# Altium PCB 3D-RelayBoard-multi.PcbDoc
Units mm, origin at the board's own origin, x right, y up, seen from the top; angles counter-clockwise.
Board outline 156 x 231 mm, 4 copper layers (Top Layer, Mid-Layer 1, Mid-Layer 2, Bottom Layer); 62 components, 75 nets, 234 pads, 9 vias.
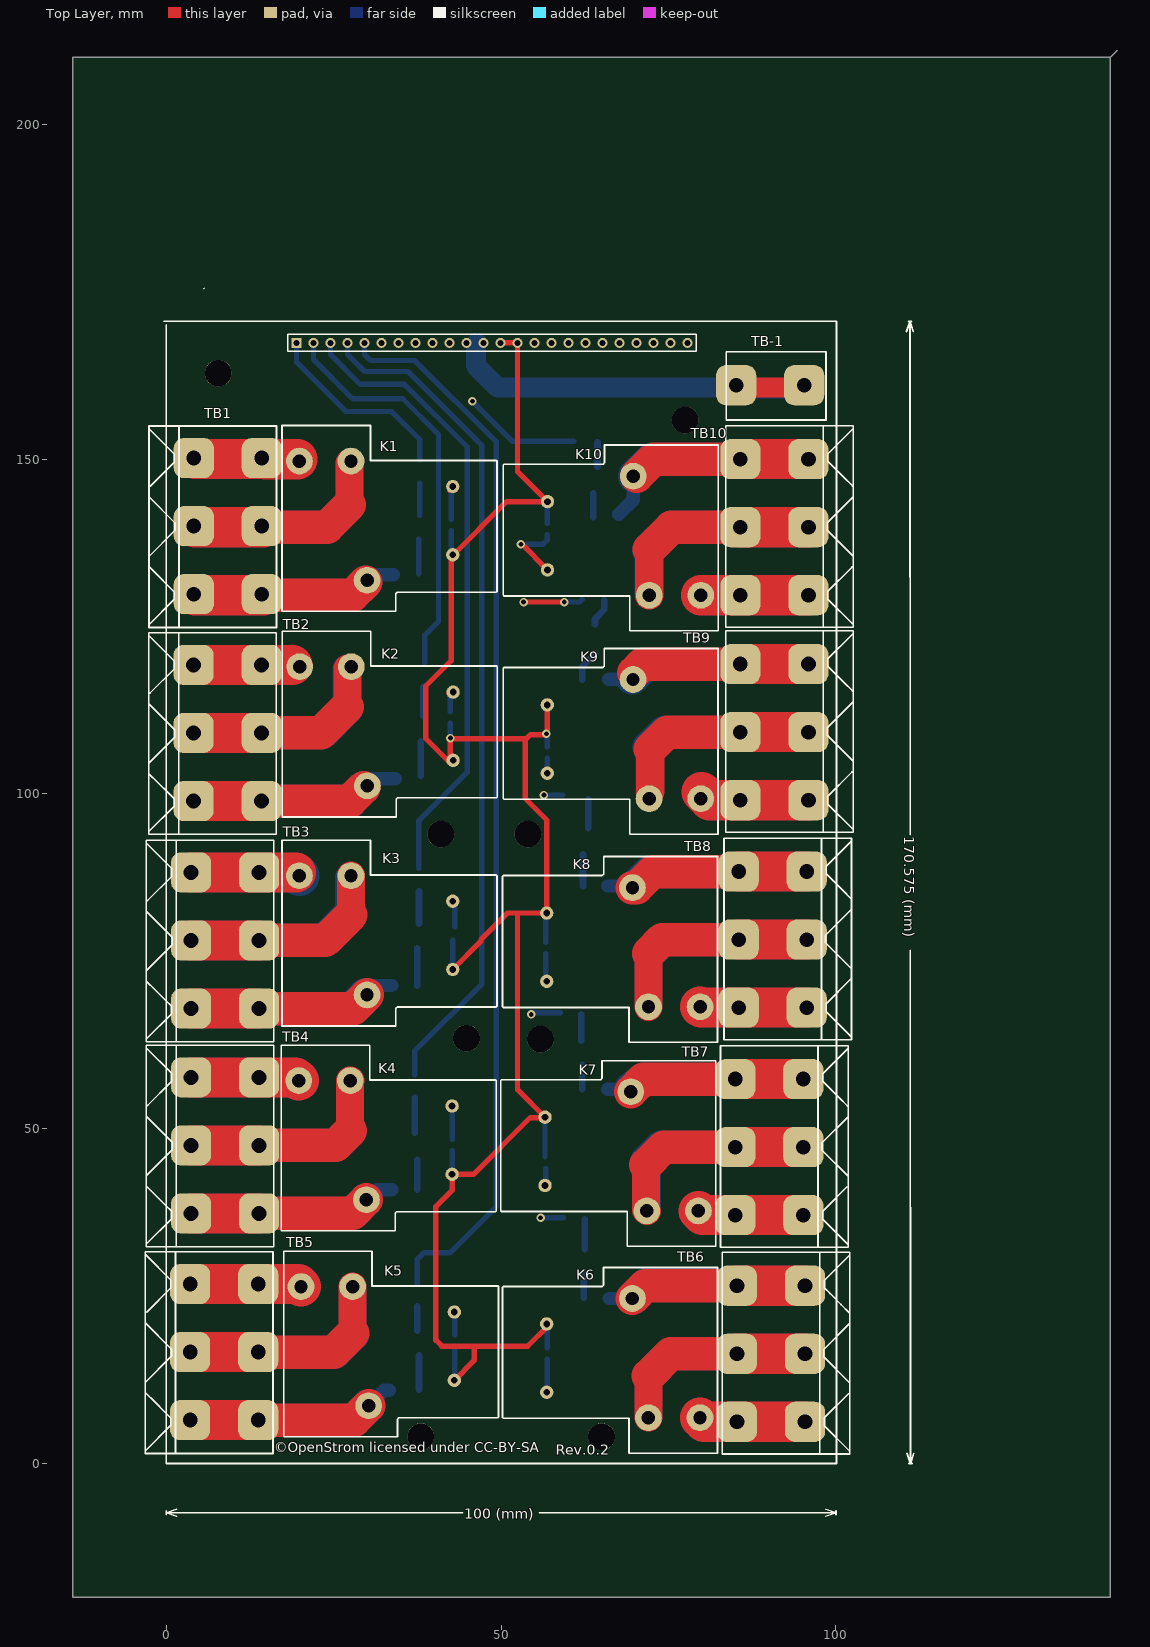
[diagram p0: Top Layer view]
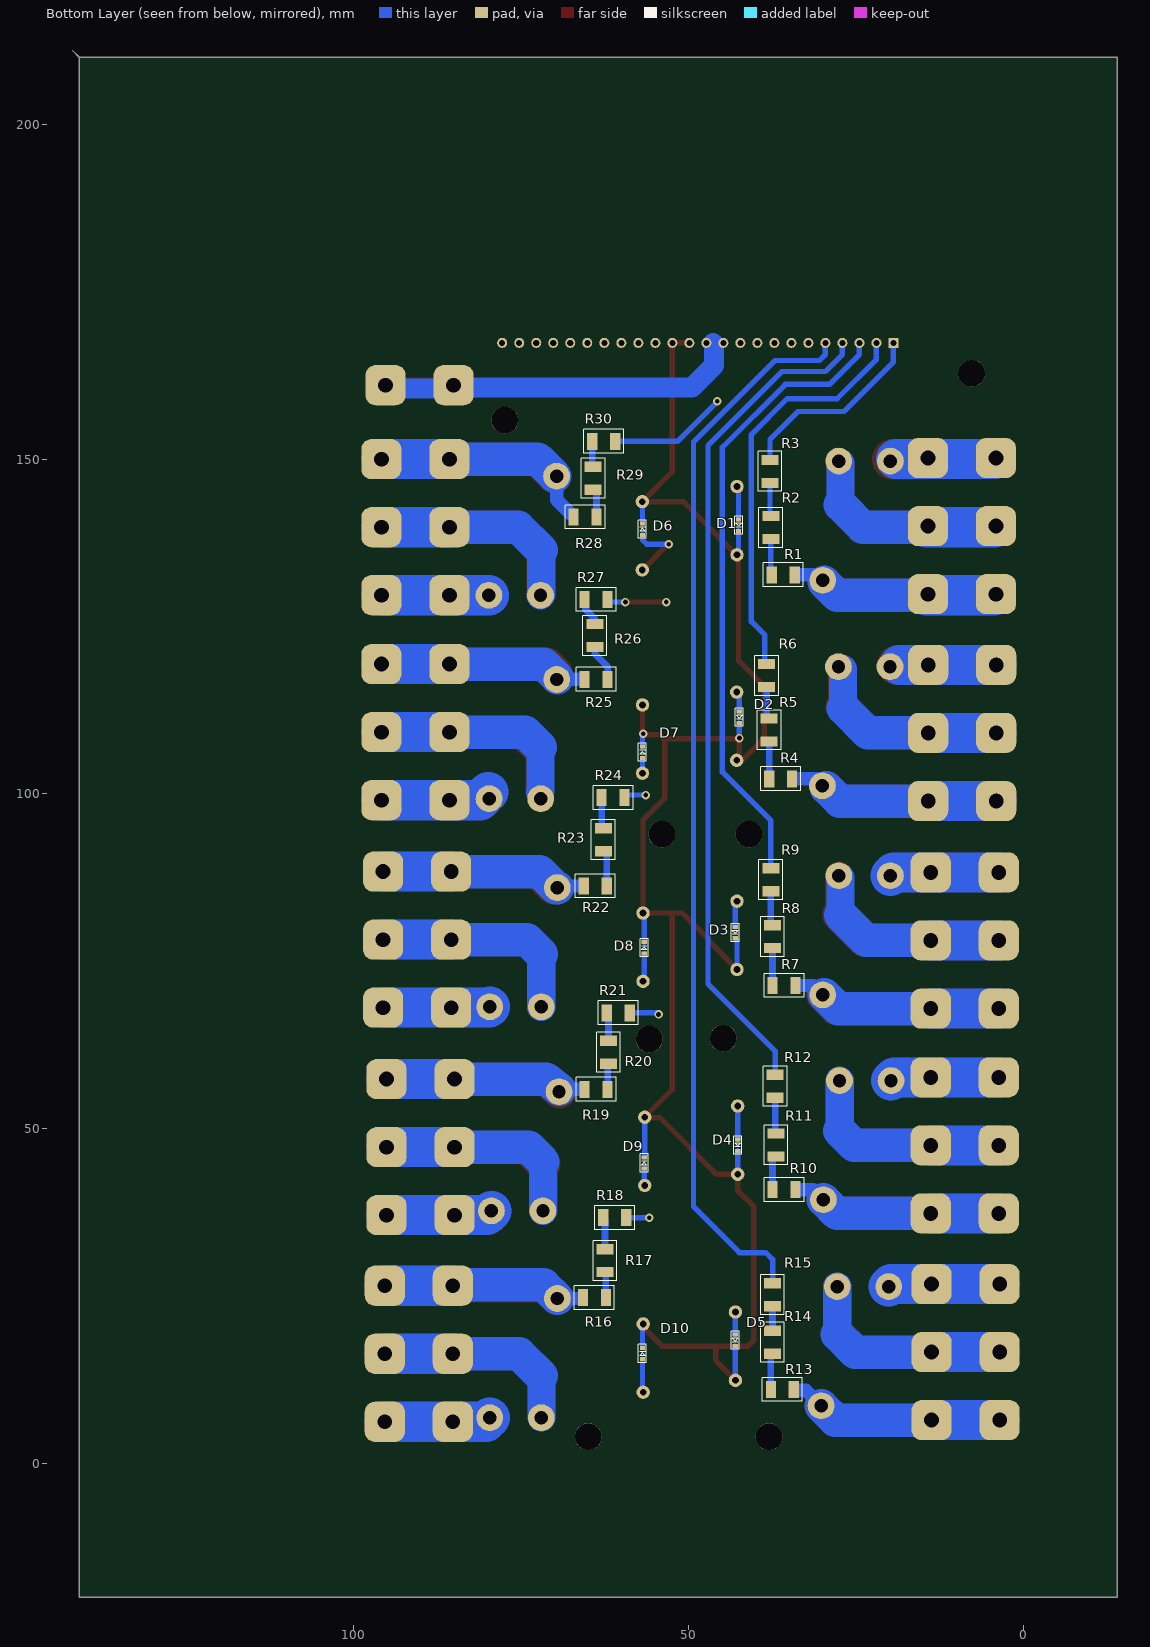
[diagram p1: Bottom Layer view, seen from below]
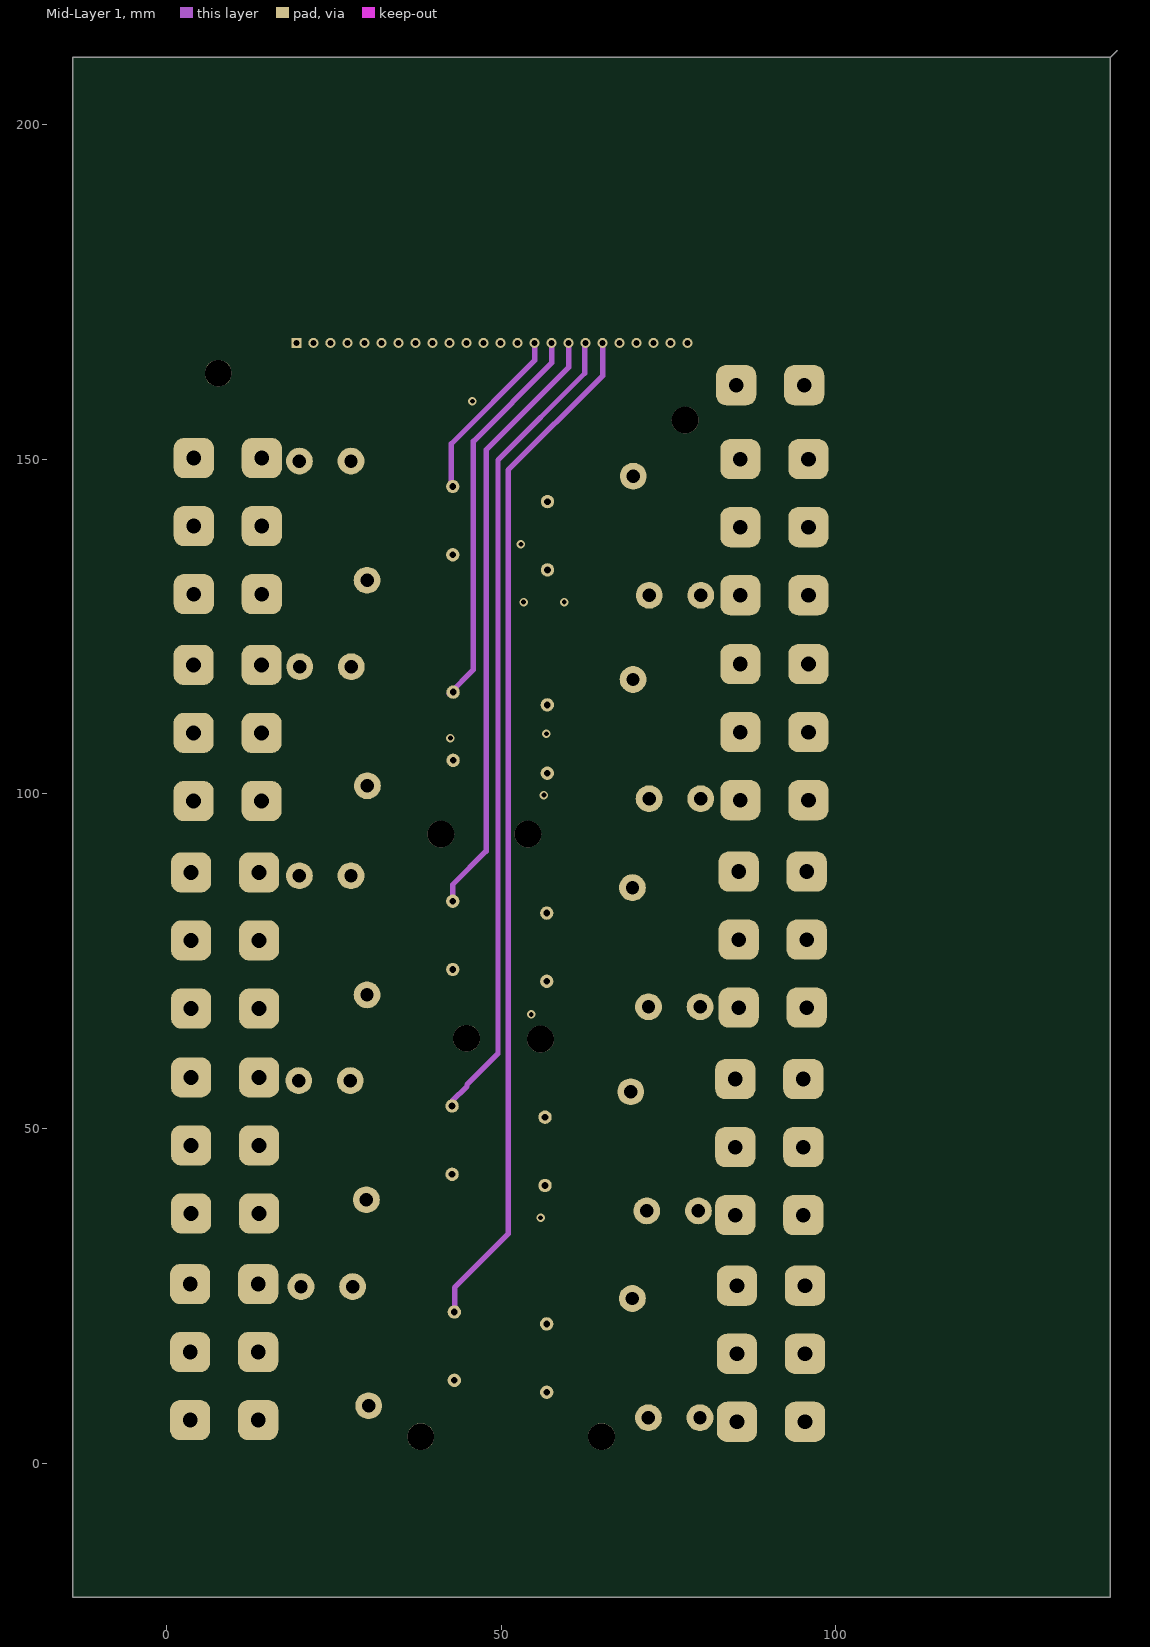
[diagram p2: Mid-Layer 1]
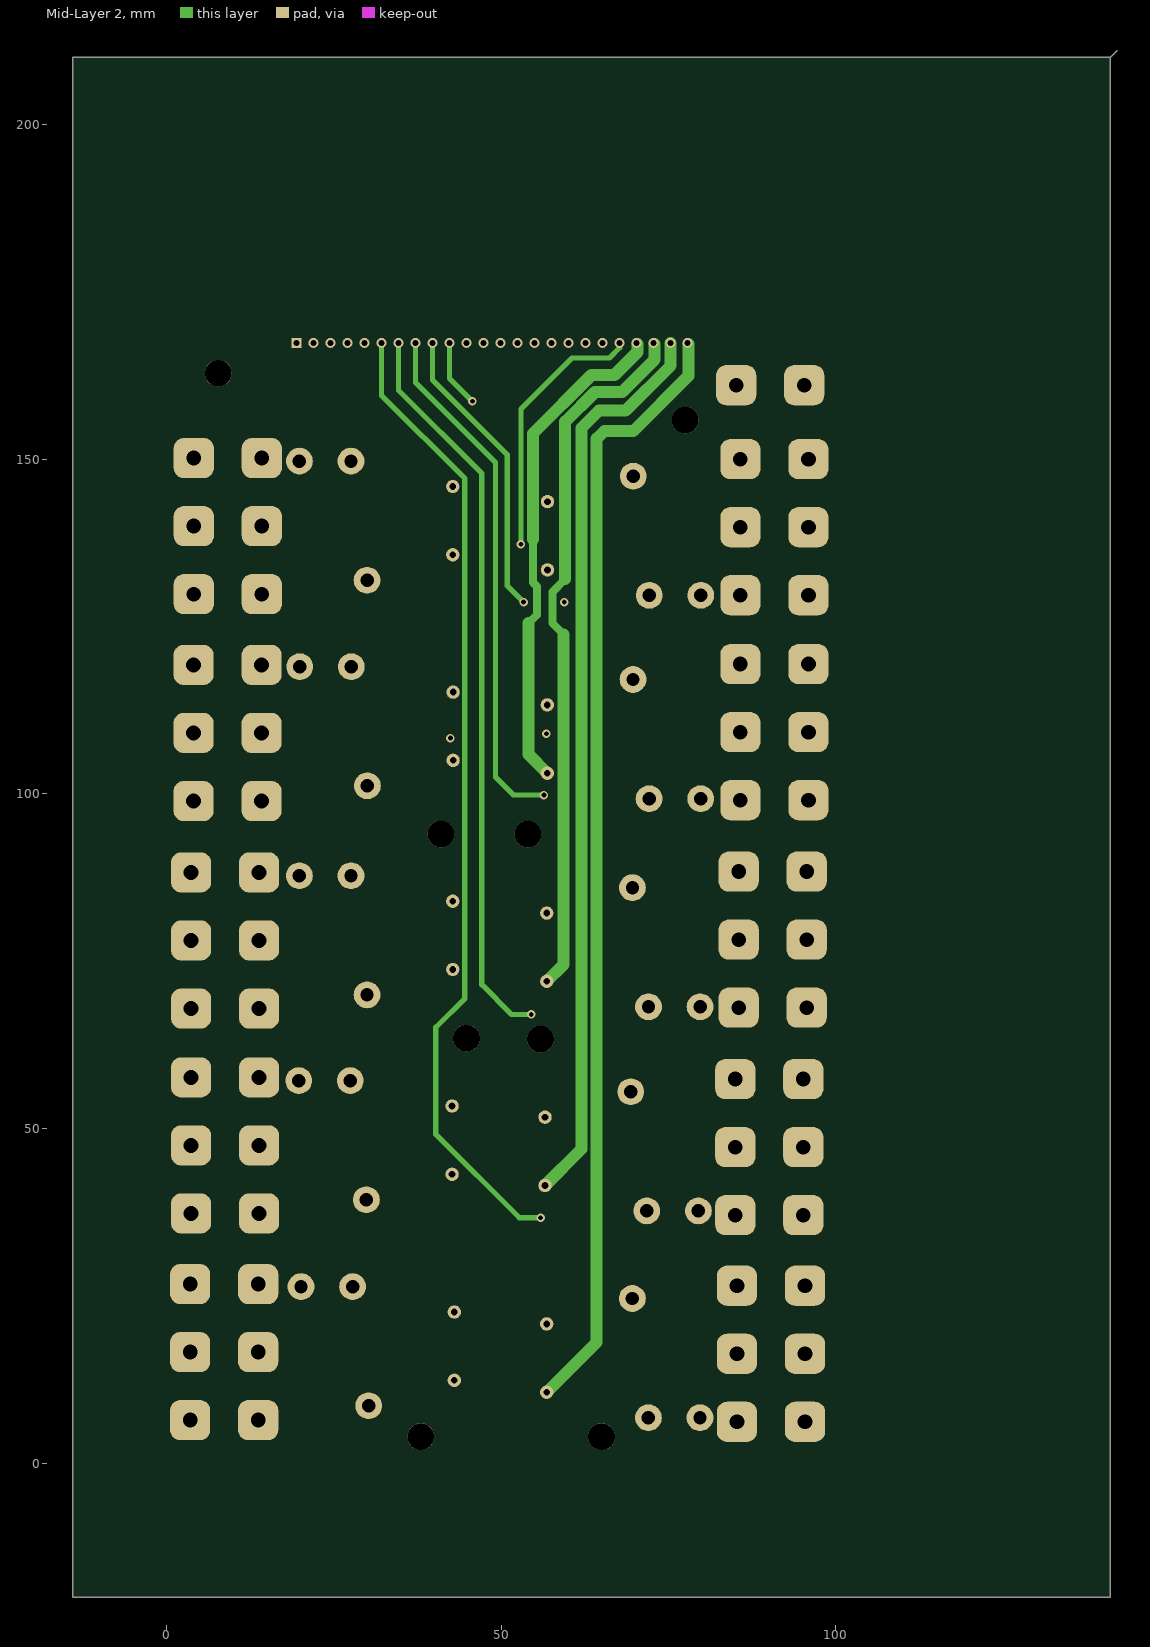
[diagram p3: Mid-Layer 2]

## Layer stack, top to bottom
Top Layer: signal copper 0.0356
Dielectric: core 0.32, FR-4, Dk 4.8
Mid-Layer 1: signal copper 0.0356
Dielectric: prepreg 0.32, FR-4, Dk 4.8
Mid-Layer 2: signal copper 0.0356
Dielectric: core 0.32, FR-4, Dk 4.8
Bottom Layer: signal copper 0.0356

## Board outline
-14,-20 -14,210 141,210 142,211 141,210 141,-20

## Design rules (kind name [scope] priority, off if disabled: settings)
Clearance [All] p1: gap=0.254
Height [All] p1: minheight=0 maxheight=35 prefheight=12.7
HoleSize [All] p1: absolutevalues=TRUE maxlimit=10 minlimit=0.025 maxpercent=80.000 minpercent=20.000
PolygonConnect [All] p1: connectstyle=Relief reliefconductorwidth=0.254 reliefentries=4 polygonreliefangle="90 Angle" airgapwidth=0.254
RoutingVias [All] p1: holewidth=0.711 width=1.27 viastyle="Through Hole" minholewidth=0.711 minwidth=1.27 maxholewidth=10 maxwidth=1.27
SilkToSilkClearance [All] p1 off: silktosilkclearance=0.254
SilkToSolderMaskClearance [IsPad] p1 off: minsilkscreentomaskgap=0.254 clearancetoexposedcopper=TRUE
SolderMaskExpansion [All] p1: expansion=0.102
Width [All] p1: maxlimit=10 minlimit=0.254 preferedwidth=0.254
24 further rules are at their usual default settings.

## Components (designator, comment, footprint, x,y, rotation, side; value= is the part's Value field where it differs from the comment)
D1 "1N4148" SOD523 42.545,139.27 r90 bottom
D2 "1N4148" SOD523 42.418,110.568 r90 bottom
D3 "1N4148" SOD523 43.053,78.437 r90 bottom
D4 "1N4148" SOD523 42.672,46.687 r90 bottom
D5 "1N4148" SOD523 43.053,17.526 r90 bottom
D6 "1N4148" SOD523 56.896,140.384 r270 bottom
D7 "1N4148" SOD523 56.896,107.061 r270 bottom
D8 "1N4148" SOD523 56.642,77.851 r270 bottom
D9 "1N4148" SOD523 56.642,45.72 r270 bottom
D10 "1N4148" SOD523 56.896,17.272 r270 bottom
K1 "Relay-SPDT" "Relay BT90 - duplicate" 29.975,131.9 r90 top
K2 "Relay-SPDT" "Relay BT90 - duplicate" 30.025,101.2 r90 top
K3 "Relay-SPDT" "Relay BT90 - duplicate" 29.972,69.977 r90 top
K4 "Relay-SPDT" "Relay BT90 - duplicate" 29.872,39.38 r90 top
K5 "Relay-SPDT" "Relay BT90 - duplicate" 30.213,8.616 r90 top
K6 "Relay-SPDT" "Relay BT90 - duplicate" 69.596,24.638 r270 top (schematic designator K10)
K7 "Relay-SPDT" "Relay BT90 - duplicate" 69.355,55.519 r270 top (schematic designator K9)
K8 "Relay-SPDT" "Relay BT90 - duplicate" 69.609,85.999 r270 top
K9 "Relay-SPDT" "Relay BT90 - duplicate" 69.696,117.084 r270 top (schematic designator K7)
K10 "Relay-SPDT" "Relay BT90 - duplicate" 69.723,147.447 r270 top (schematic designator K6)
P1 "Header 24" HDR24x1Male 99.787,215.594 r0 top
R1 "270K/5%/.5" 1210C-GENERIC 37.592,132.715 r180 bottom
R2 "270K/5%/.5" 1210C-GENERIC 37.719,141.478 r270 bottom
R3 "270K/5%/.5" 1210C-GENERIC 37.846,149.86 r270 bottom
R4 "270K/5%/.5" 1210C-GENERIC 37.973,102.235 r180 bottom
R5 "270K/5%/.5" 1210C-GENERIC 37.973,111.252 r270 bottom
R6 "270K/5%/.5" 1210C-GENERIC 38.354,119.38 r270 bottom
R7 "270K/5%/.5" 1210C-GENERIC 37.465,71.374 r180 bottom
R8 "270K/5%/.5" 1210C-GENERIC 37.465,80.391 r270 bottom
R9 "270K/5%/.5" 1210C-GENERIC 37.719,88.9 r270 bottom
R10 "270K/5%/.5" 1210C-GENERIC 37.465,40.894 r180 bottom
R11 "270K/5%/.5" 1210C-GENERIC 36.957,49.276 r270 bottom
R12 "270K/5%/.5" 1210C-GENERIC 37.084,58.039 r270 bottom
R13 "270K/5%/.5" 1210C-GENERIC 37.719,11.049 r180 bottom
R14 "270K/5%/.5" 1210C-GENERIC 37.465,19.812 r270 bottom
R15 "270K/5%/.5" 1210C-GENERIC 37.465,26.924 r270 bottom
R16 "270K/5%/.5" 1210C-GENERIC 62.357,24.765 r0 bottom (schematic designator R28)
R17 "270K/5%/.5" 1210C-GENERIC 62.484,32.004 r270 bottom (schematic designator R29)
R18 "270K/5%/.5" 1210C-GENERIC 59.309,36.703 r0 bottom (schematic designator R30)
R19 "270K/5%/.5" 1210C-GENERIC 62.103,55.88 r0 bottom (schematic designator R25)
R20 "270K/5%/.5" 1210C-GENERIC 61.976,63.119 r270 bottom (schematic designator R26)
R21 "270K/5%/.5" 1210C-GENERIC 58.801,67.31 r0 bottom (schematic designator R27)
R22 "270K/5%/.5" 1210C-GENERIC 62.23,86.233 r0 bottom
R23 "270K/5%/.5" 1210C-GENERIC 62.738,94.869 r270 bottom
R24 "270K/5%/.5" 1210C-GENERIC 59.563,99.441 r0 bottom
R25 "270K/5%/.5" 1210C-GENERIC 62.103,117.094 r0 bottom (schematic designator R19)
R26 "270K/5%/.5" 1210C-GENERIC 64.008,125.349 r270 bottom (schematic designator R20)
R27 "270K/5%/.5" 1210C-GENERIC 62.103,129.032 r0 bottom (schematic designator R21)
R28 "270K/5%/.5" 1210C-GENERIC 63.754,141.351 r0 bottom (schematic designator R16)
R29 "270K/5%/.5" 1210C-GENERIC 64.262,148.844 r270 bottom (schematic designator R17)
R30 "270K/5%/.5" 1210C-GENERIC 60.96,152.654 r0 bottom (schematic designator R18)
TB1 "DG135-3" DG135-1 4.1,150.15 r270 top
TB2 "DG135-3" DG135-1 4.064,119.253 r270 top
TB3 "DG135-3" DG135-1 3.683,88.265 r270 top
TB4 "DG135-3" DG135-1 3.683,57.658 r270 top
TB5 "DG135-3" DG135-1 3.556,26.797 r270 top
TB6 "DG135-3" DG135-1 95.377,6.223 r90 top (schematic designator TB10)
TB7 "DG135-3" DG135-1 95.123,37.084 r90 top (schematic designator TB9)
TB8 "DG135-3" DG135-1 95.631,68.072 r90 top
TB9 "DG135-3" DG135-1 95.885,99.06 r90 top (schematic designator TB7)
TB10 "DG135-3" DG135-1 95.885,129.667 r90 top (schematic designator TB6)
TB-1 "DG135-1" DG135-0 85.1,161.025 r0 top

## Footprints (in the part's own frame and the unit in brackets; to place one, negate y for a bottom-side part, rotate by r counter-clockwise, add the part's x,y. Pads: shape width x height; smd on the part's side, far side on the other; paste and mask are expansions set on the pad)
1210C-GENERIC [mil]
  rect 60x100 smd: 1(0,0) 2(135,0)
  silkscreen extent -50,-70 185,70, body extent -10,-50 145,50, height 46
DG135-0 [mm]
  rrect50% 6x6 hole 2.2: 1(0,0) 2(10.16,0)
  silkscreen extent -1.5,-5.2 13.4,5, body extent -3.1,-5.33 13.53,5.13, height 30
DG135-1 [mm]
  rrect50% 6x6 hole 2.2: 1(0,10.16) 1(0,0) 2(10.16,10.16) 2(10.16,0) 3(20.32,10.16) 3(20.32,0)
  silkscreen extent -4.8,-6.7 25.3,12.36, body extent -4.93,-6.83 25.43,13.26, height 31
HDR24x1Male [mm]
  rect 1.5x1.5 hole 0.9: 1(-80.367,-48.244)
  round 1.5 hole 0.9: 2(-77.827,-48.244) 3(-75.287,-48.244) 4(-72.747,-48.244) 5(-70.207,-48.244) 6(-67.667,-48.244) 7(-65.127,-48.244) 8(-62.587,-48.244) 9(-60.047,-48.244) 10(-57.507,-48.244) 11(-54.967,-48.244) 12(-52.427,-48.244) 13(-49.887,-48.244) 14(-47.347,-48.244) 15(-44.807,-48.244) 16(-42.267,-48.244) 17(-39.727,-48.244) 18(-37.187,-48.244) 19(-34.647,-48.244) 20(-32.107,-48.244) 21(-29.567,-48.244) 22(-27.027,-48.244) 23(-24.487,-48.244) 24(-21.947,-48.244)
  silkscreen extent -81.64,-49.51 -20.68,-46.97, body extent -81.58,-48.97 -20.62,-38.2, height 2.24
"Relay BT90 - duplicate" [mm]
  round 2 hole 1: 1(3.8,-12.8) 2(14,-12.8)
  round 4 hole 2: 3(17.8,10.1) 4(0,0) 5(17.8,2.4)
  round 0 all layers, no hole: 6(8.9,-15.2)
  silkscreen extent -4.64,-19.4 23.1,12.7, body extent -4.77,-19.53 23.23,12.83, height 21
SOD523 [mm]
  rect 0.6x0.8 smd: A(1.7,0) K(0,0)
  silkscreen extent -0.5,-0.6 2.2,0.6

## Part data
D1 D2 D3 D5 D6 D7 D8 D9 D10: library part 1N4001, "1N4001"
D4: library part 1N4001
K1 K2 K3 K4 K5 K6 K7 K8 K9 K10: "Single-Pole Dual-Throw Relay"
P1: "Header, 24-Pin"
R1 R2 R3 R4 R5 R6 R7 R8 R9 R10 R11 R12 R13 R14 R15 R16 R17 R18 R19 R20 R21 R22 R23 R24 R25 R26 R27 R28 R29 R30: library part Res3, "Resistor"
TB1 TB2 TB3 TB4 TB5 TB6 TB7 TB8 TB9 TB10: library part "Header 3", "Header, 3-Pin"
TB-1: library part Socket, "Socket"

## Free pads (board coordinates)
  round 4 hole 4: 2(7.747,162.814) 2(38,4) 2(41,94) 2(44.831,63.5) 2(54,94) 2(55.88,63.373) 2(65,4) 2(77.47,155.829)

## Via types
v1: diameter 1.27, hole 0.711, Top Layer to Bottom Layer, 9 vias

## Nets (pads, with @x,y where several pads share a name; then routed paths per layer and width w, separated by ;. In a path a pad name is that pad's centre, name@x,y a point inside that pad or via, vN(x,y) a via of type N, cw(c..) or ccw(c..) an arc to the next point about the centre after c; other vN are vias at no path point)
Net3: K9.4 R25.2 TB9.3 | length 58.7
  Top Layer w5: K9.4@69.823,118.1 71.103,119.38 TB9.3@85.725,119.38
  Top Layer w6: TB9.3@85.725,119.38 TB9.3@95.885,119.38
  Bottom Layer w2: R25.2@66.04,117.094 69.686,117.094 K9.4 ; K9.4@68.326,117.348 K9.4@69.596,117.348
  Bottom Layer w5: K9.4@69.596,117.348 71.628,119.38 TB9.3@85.725,119.38
  Bottom Layer w6: TB9.3@85.725,119.38 TB9.3@95.885,119.38
Net4: K9.3 TB9.1 | length 33
  Top Layer w6: K9.3@79.923,100.3 81.163,99.06 85.725,99.06 TB9.1@95.885,99.06
  Bottom Layer w6: K9.3@79.923,100.3 81.163,99.06 85.725,99.06 TB9.1@95.885,99.06
Net5: R26.1 R27.2 | length 4.1
  Bottom Layer w1: R26.1 64.008,126.111 65.405,127.508 R27.2@65.405,128.905
NetD1_A: D1.A K1.2 P1.15 | length 31.9
  Top Layer w0.8: K1.2@42.291,145.328 K1.2@42.545,145.582
  Mid-Layer 1 w0.8: K1.2@42.545,145.582 42.545,152.273 54.991,164.719 P1.15@54.991,167.339
  Bottom Layer w0.8: D1.A K1.2@42.545,145.582
NetD1_K: D1.K D2.K D3.K D4.K D5.K D6.K D7.K D8.K D9.K D10.K K1.1 K2.1 K3.1 K4.1 K5.1 K6.1 K7.1 K8.1 K9.1 K10.1 P1.13 P1.14 | length 285.2
  Top Layer w0.8: K2.1@42.251,104.745 38.735,108.261 38.735,116.078 42.545,119.888 K1.1@42.545,135.382 ; K1.1@42.291,135.636 K1.1@42.545,135.382 ; K2.1@42.418,104.912 v1@42.418,108.253 ; v1(42.418,108.331) v1@42.418,108.253 ; K3.1 46.99,77.995 ; K5.1 45.974,15.377 45.974,17.526 ; 43.013,17.486 43.053,17.526 ; 46.99,78.232 50.957,82.199 52.451,82.199 ; P1.13 P1.14 ; P1.14@52.451,167.35 52.451,148.119 K10.1 ; v1@56.769,108.839 54.356,108.839 53.77,108.253 ; K6.1@56.896,20.447 53.975,17.526 45.974,17.526 ; v1@56.896,108.966 K9.1 ; K10.1@56.896,143.62 K10.1 ; v1@42.418,108.253 53.77,108.253 ; K1.1@42.545,135.382 50.81,143.647 K10.1 ; 43.053,17.526 41.148,17.526 40.259,18.415 40.259,38.354 42.672,40.767 K4.1 45.847,43.18 54.299,51.632 56.642,51.632 52.451,55.823 52.451,82.199 ; 43.053,17.526 45.974,17.526 ; 52.451,82.199 K8.1 56.809,96.099 53.594,99.314 53.594,108.077 53.77,108.253
  Bottom Layer w0.8: v1(42.418,108.331) D2.K ; K1.1@42.545,135.382 D1.K ; K4.1 D4.K ; K3.1 D3.K@42.772,78.156 ; K5.1@43.053,12.456 D5.K ; D9.K@56.555,45.807 K7.1 ; D8.K K8.1@56.642,82.032 ; v1(56.769,108.966) 56.896,108.839 D7.K ; D10.K K6.1@56.896,20.738 ; D6.K K10.1@56.896,143.62
NetD2_A: D2.A K2.2 P1.16 | length 61.3
  Top Layer w0.8: K2.2@42.251,114.945 K2.2@42.291,114.905
  Mid-Layer 1 w0.8: K2.2@42.251,114.945 45.847,118.541 45.847,152.654 57.531,164.338 P1.16@57.531,167.339
  Bottom Layer w0.8: D2.A K2.2@42.418,114.778
NetD3_A: D3.A K3.2 P1.17 | length 94.3
  Top Layer w0.8: K3.2 K3.2@42.926,83.823
  Mid-Layer 1 w0.8: K3.2 42.772,86.46 47.752,91.44 47.752,151.384 60.071,163.703 P1.17@60.071,167.339
  Bottom Layer w0.8: D3.A K3.2@43.053,83.696
NetD4_A: D4.A K4.2 P1.18 | length 127.2
  Top Layer w0.8: K4.2@42.545,53.253 K4.2
  Mid-Layer 1 w0.8: K4.2 42.672,54.102 44.895,56.325 44.895,56.578 49.53,61.214 49.53,149.86 62.484,162.814 P1.18@62.484,167.234
  Bottom Layer w0.8: D4.A K4.2
NetD5_A: D5.A K5.2 P1.19 | length 157.3
  Top Layer w0.8: K5.2 K5.2@43.053,22.576
  Mid-Layer 1 w0.8: K5.2 43.053,22.656 43.053,26.289 51.054,34.29 51.054,148.336 65.151,162.433 65.151,167.339 P1.19
  Bottom Layer w0.8: D5.A K5.2@43.053,22.576
NetD6_A: D6.A K10.2 P1.20 | length 49.2
  Top Layer w0.8: v1(52.959,137.287) 53.083,137.287 K10.2
  Mid-Layer 2 w0.8: v1(52.959,137.287) 52.959,157.48 60.579,165.1 66.167,165.1 P1.20@67.691,166.624
  Bottom Layer w0.8: v1(52.959,137.287) 56.261,137.287 56.896,137.922 D6.A
NetD7_A: D7.A K9.2 P1.21 | length 76.8
  Mid-Layer 2 w1.2: 54.102,125.498 55.35,126.746 55.35,130.975 54.775,131.55 ; 54.737,131.588 54.737,136.535 ; 54.748,136.546 54.748,138.028
  Mid-Layer 2 w1.8: 54.102,125.498 54.102,105.878 K9.2 ; 54.748,138.028 54.737,138.039 54.737,153.797 63.5,162.56 66.929,162.56 70.358,165.989 P1.21@70.358,167.212
  Bottom Layer w0.8: K9.2 D7.A
NetD8_A: D8.A K8.2 P1.22 | length 109.7
  Top Layer w0.8: K8.2@56.769,72.039 K8.2
  Mid-Layer 2 w1.2: 59.309,123.825 57.647,125.487 57.647,130.164 59.563,132.08
  Mid-Layer 2 w1.8: K8.2 59.309,74.499 59.309,123.825 ; 59.563,132.08 59.563,155.575 64.008,160.02 68.072,160.02 72.898,164.846 P1.22@72.898,167.212
  Bottom Layer w0.8: K8.2@56.642,72.166 D8.A
NetD9_A: D9.A K7.2 P1.23 | length 138.5
  Mid-Layer 2 w1.8: K7.2 61.976,46.94 61.976,154.604 64.598,157.226 68.58,157.226 75.311,163.957 P1.23@75.311,167.339
  Bottom Layer w0.8: K7.2 56.642,41.606 D9.A
NetD10_A: D10.A K6.2 P1.24 | length 172.9
  Top Layer w0.8: K6.2 K6.2@56.896,10.738
  Mid-Layer 2 w1.8: K6.2 64.262,18.104 64.262,153.035 65.405,154.178 69.723,154.178 77.978,162.433 P1.24@77.978,167.212
  Bottom Layer w0.8: K6.2@56.896,10.738 D10.A
NetK1_3: K1.3 TB1.1 | length 29.7
  Top Layer w6: TB1.1@4.318,149.987 TB1.1@14.478,149.987 ; TB1.1@14.785,149.975 K1.3@19.6,149.975
  Bottom Layer w6: TB1.1@4.318,149.987 K1.3@19.04,149.987
NetK1_4: K1.4 R1.2 TB1.3 | length 55.5
  Top Layer w5: TB1.3@14.478,129.667 27.83,129.667 K1.4@29.745,131.582
  Top Layer w6: TB1.3@4.318,129.667 TB1.3@14.478,129.667
  Bottom Layer w2: K1.4@30.878,132.715 R1.2@33.909,132.715
  Bottom Layer w5: TB1.3@14.478,129.667 27.83,129.667 K1.4@29.745,131.582
  Bottom Layer w6: TB1.3@4.318,129.667 TB1.3@14.478,129.667
NetK1_5: K1.5 TB1.2 | length 61.2
  Top Layer w4.2: 27.345,143.169 K1.5@27.345,149.382
  Top Layer w5: TB1.2@14.478,139.827 24.003,139.827 27.345,143.169
  Top Layer w6: TB1.2@4.318,139.827 TB1.2@14.478,139.827
  Bottom Layer w4.2: 27.345,143.169 K1.5@27.345,149.382
  Bottom Layer w5: TB1.2@14.478,139.827 24.003,139.827 27.345,143.169
  Bottom Layer w6: TB1.2@4.318,139.827 TB1.2@14.478,139.827
NetK2_3: K2.3 TB2.1 | length 29.2
  Top Layer w6: TB2.1@4.064,119.253 14.224,119.253 K2.3@18.843,119.253
  Bottom Layer w6: TB2.1@4.064,119.253 14.224,119.253 K2.3@18.495,119.253
NetK2_4: K2.4 R4.2 TB2.3 | length 57.7
  Top Layer w5: TB2.3@14.224,98.933 27.439,98.933 K2.4@29.451,100.945
  Top Layer w6: TB2.3@4.064,98.933 TB2.3@14.224,98.933
  Bottom Layer w1: K2.4@29.451,100.945 K2.4@30.741,102.235
  Bottom Layer w2: K2.4@30.741,102.235 R4.2@34.163,102.235
  Bottom Layer w5: TB2.3@14.224,98.933 27.439,98.933 K2.4@29.451,100.945
  Bottom Layer w6: TB2.3@4.064,98.933 TB2.3@14.224,98.933
NetK2_5: K2.5 TB2.2 | length 60.6
  Top Layer w4.2: 27.051,113.03 K2.5@27.051,118.745
  Top Layer w5: TB2.2@14.224,109.093 23.114,109.093 27.051,113.03
  Top Layer w6: TB2.2@4.064,109.093 TB2.2@14.224,109.093
  Bottom Layer w4.2: 26.924,112.776 K2.5@26.924,118.618
  Bottom Layer w5: TB2.2@14.224,109.093 23.241,109.093 26.924,112.776
  Bottom Layer w6: TB2.2@4.064,109.093 TB2.2@14.224,109.093
NetK3_3: K3.3 TB3.1 | length 32.1
  Top Layer w6: TB3.1@3.683,88.265 13.843,88.265 K3.3@19.384,88.265
  Bottom Layer w6: TB3.1@3.683,88.265 13.843,88.265 19.384,88.265 K3.3
NetK3_4: K3.4 R7.2 TB3.3 | length 58.3
  Top Layer w5: TB3.3@13.843,67.945 27.94,67.945 K3.4
  Top Layer w6: TB3.3@3.683,67.945 TB3.3@13.843,67.945
  Bottom Layer w1: K3.4 K3.4@31.369,71.374
  Bottom Layer w2: K3.4@31.369,71.374 R7.2@33.655,71.374
  Bottom Layer w5: TB3.3@13.843,67.945 27.686,67.945 K3.4@29.718,69.977
  Bottom Layer w6: TB3.3@3.683,67.945 TB3.3@13.843,67.945
NetK3_5: K3.5 TB3.2 | length 62.1
  Top Layer w4.2: 27.572,81.928 K3.5
  Top Layer w5: TB3.2@13.843,78.105 23.749,78.105 27.572,81.928
  Top Layer w6: TB3.2@3.683,78.105 TB3.2@13.843,78.105
  Bottom Layer w4.2: 27.305,81.915 K3.5@27.305,87.51
  Bottom Layer w5: TB3.2@13.843,78.105 23.495,78.105 27.305,81.915
  Bottom Layer w6: TB3.2@3.683,78.105 TB3.2@13.843,78.105
NetK4_3: K4.3 TB4.1 | length 32.6
  Top Layer w6: TB4.1@3.683,57.658 13.843,57.658 19.294,57.658 K4.3
  Bottom Layer w6: TB4.1@3.683,57.658 13.843,57.658 19.294,57.658 K4.3
NetK4_4: K4.4 R10.2 TB4.3 | length 58.5
  Top Layer w5: TB4.3@13.843,37.338 27.813,37.338 29.855,39.38 K4.4
  Top Layer w6: TB4.3@3.683,37.338 TB4.3@13.843,37.338
  Bottom Layer w1: K4.4 31.386,40.894
  Bottom Layer w2: 31.386,40.894 R10.2@33.655,40.894
  Bottom Layer w5: TB4.3@13.843,37.338 27.83,37.338 K4.4
  Bottom Layer w6: TB4.3@3.683,37.338 TB4.3@13.843,37.338
NetK4_5: K4.5 TB4.2 | length 64.4
  Top Layer w4.2: 27.432,49.657 27.432,57.14 K4.5
  Top Layer w5: TB4.2@13.843,47.498 25.273,47.498 27.432,49.657
  Top Layer w6: TB4.2@3.683,47.498 TB4.2@13.843,47.498
  Bottom Layer w4.2: 27.432,49.657 27.432,57.14 K4.5
  Bottom Layer w5: TB4.2@13.843,47.498 25.273,47.498 27.432,49.657
  Bottom Layer w6: TB4.2@3.683,47.498 TB4.2@13.843,47.498
NetK5_3: K5.3 TB5.1 | length 33.4
  Top Layer w6: TB5.1@3.556,26.797 13.716,26.797 19.732,26.797 K5.3
  Bottom Layer w6: TB5.1@3.556,26.797 13.716,26.797 19.732,26.797 K5.3
NetK5_4: K5.4 R13.2 TB5.3 | length 59.1
  Top Layer w5: TB5.3@13.716,6.477 28.074,6.477 K5.4
  Top Layer w6: TB5.3@3.556,6.477 TB5.3@13.716,6.477
  Bottom Layer w2: K5.4 32.519,10.922 33.274,10.922
  Bottom Layer w5: TB5.3@13.716,6.477 28.074,6.477 K5.4
  Bottom Layer w6: TB5.3@3.556,6.477 TB5.3@13.716,6.477
NetK5_5: K5.5 TB5.2 | length 64.9
  Top Layer w4.2: 27.813,19.431 K5.5
  Top Layer w5: TB5.2@13.716,16.637 25.019,16.637 27.813,19.431
  Top Layer w6: TB5.2@3.556,16.637 TB5.2@13.716,16.637
  Bottom Layer w4.2: 27.813,19.304 K5.5
  Bottom Layer w5: TB5.2@13.716,16.637 25.146,16.637 27.813,19.304
  Bottom Layer w6: TB5.2@3.556,16.637 TB5.2@13.716,16.637
NetK6_3: K10.3 TB10.1 | length 32.1
  Top Layer w6: K10.3@79.843,129.667 85.725,129.667 TB10.1@95.885,129.667
  Bottom Layer w6: K10.3 79.843,129.667 85.725,129.667 TB10.1@95.885,129.667
NetK6_4: K10.4 R28.2 TB10.3 | length 60.3
  Top Layer w5: K10.4@70.231,147.447 72.771,149.987 TB10.3@85.725,149.987
  Top Layer w6: TB10.3@85.725,149.987 TB10.3@95.885,149.987
  Bottom Layer w2: R28.2@67.564,141.732 69.723,143.891 K10.4
  Bottom Layer w5: K10.4@69.977,147.447 72.517,149.987 TB10.3@85.725,149.987
  Bottom Layer w6: TB10.3@85.725,149.987 TB10.3@95.885,149.987
NetK6_5: K10.5 TB10.2 | length 64.1
  Top Layer w4.2: K10.5 72.123,136.512
  Top Layer w5: 72.123,136.512 75.438,139.827 TB10.2@85.725,139.827
  Top Layer w6: TB10.2@85.725,139.827 TB10.2@95.885,139.827
  Bottom Layer w4.2: 72.009,136.398 72.009,129.761 K10.5
  Bottom Layer w5: 72.009,136.398 75.438,139.827 TB10.2@85.725,139.827
  Bottom Layer w6: TB10.2@85.725,139.827 TB10.2@95.885,139.827
NetK7_5: K9.5 TB9.2 | length 62.4
  Top Layer w4.2: K9.5@72.223,100.3 72.263,100.34 72.263,106.68
  Top Layer w5: 72.263,106.68 74.803,109.22 TB9.2@85.725,109.22
  Top Layer w6: TB9.2@85.725,109.22 TB9.2@95.885,109.22
  Bottom Layer w4.2: 72.136,106.934 72.136,100.387 K9.5@72.223,100.3
  Bottom Layer w5: 72.136,106.934 74.422,109.22 TB9.2@85.725,109.22
  Bottom Layer w6: TB9.2@85.725,109.22 TB9.2@95.885,109.22
NetK8_3: K8.3 TB8.1 | length 31.9
  Top Layer w6: K8.3 79.836,68.072 85.471,68.072 TB8.1@95.631,68.072
  Bottom Layer w6: K8.3 79.836,68.072 85.471,68.072 TB8.1@95.631,68.072
NetK8_4: K8.4 R22.2 TB8.3 | length 57.5
  Top Layer w5: K8.4 70.251,85.999 72.644,88.392 TB8.3@85.471,88.392
  Top Layer w6: TB8.3@85.471,88.392 TB8.3@95.631,88.392
  Bottom Layer w2: R22.2@65.913,86.233 K8.4@69.375,86.233
  Bottom Layer w5: K8.4 69.87,85.999 72.263,88.392 TB8.3@85.471,88.392
  Bottom Layer w6: TB8.3@85.471,88.392 TB8.3@95.631,88.392
NetK8_5: K8.5 TB8.2 | length 64.9
  Top Layer w4.2: K8.5 72.009,76.2
  Top Layer w5: 72.009,76.2 74.041,78.232 TB8.2@85.471,78.232
  Top Layer w6: TB8.2@85.471,78.232 TB8.2@95.631,78.232
  Bottom Layer w4.2: K8.5 72.009,76.073
  Bottom Layer w5: 72.009,76.073 74.168,78.232 TB8.2@85.471,78.232
  Bottom Layer w6: TB8.2@85.471,78.232 TB8.2@95.631,78.232
NetK9_3: K7.3 TB7.1 | length 31.9
  Top Layer w6: K7.3 80.09,37.084 84.963,37.084 TB7.1@95.123,37.084
  Bottom Layer w6: K7.3 80.09,37.084 84.963,37.084 TB7.1@95.123,37.084
NetK9_4: K7.4 R19.2 TB7.3 | length 56.3
  Top Layer w5: K7.4 71.24,57.404 TB7.3@84.963,57.404
  Top Layer w6: TB7.3@84.963,57.404 TB7.3@95.123,57.404
  Bottom Layer w2: R19.2@65.893,55.9 K7.4@69.355,55.9
  Bottom Layer w5: K7.4@69.355,55.9 71.24,57.404 TB7.3@84.963,57.404
  Bottom Layer w6: TB7.3@84.963,57.404 TB7.3@95.123,57.404
NetK9_5: K7.5 TB7.2 | length 63.1
  Top Layer w4.2: 71.628,44.577 71.628,37.846 K7.5
  Top Layer w5: 71.628,44.577 74.295,47.244 TB7.2@84.963,47.244
  Top Layer w6: TB7.2@84.963,47.244 TB7.2@95.123,47.244
  Bottom Layer w4.2: K7.5 71.755,45.085
  Bottom Layer w5: 71.755,45.085 73.914,47.244 TB7.2@84.963,47.244
  Bottom Layer w6: TB7.2@84.963,47.244 TB7.2@95.123,47.244
NetK10_3: K6.3 TB6.1 | length 31.9
  Top Layer w6: K6.3 80.311,6.223 85.217,6.223 TB6.1@95.377,6.223
  Bottom Layer w6: K6.3 80.311,6.223 85.217,6.223 TB6.1@95.377,6.223
NetK10_4: K6.4 R16.2 TB6.3 | length 56.7
  Top Layer w5: K6.4 71.501,26.543 TB6.3@85.217,26.543
  Top Layer w6: TB6.3@85.217,26.543 TB6.3@95.377,26.543
  Bottom Layer w2: R16.2@66.167,24.638 K6.4
  Bottom Layer w5: K6.4 71.628,26.67 85.09,26.67 TB6.3@85.217,26.543
  Bottom Layer w6: TB6.3@85.217,26.543 TB6.3@95.377,26.543
NetK10_5: K6.5 TB6.2 | length 62
  Top Layer w4.2: K6.5 71.996,13.068
  Top Layer w5: 71.996,13.068 75.311,16.383 TB6.2@85.217,16.383
  Top Layer w6: TB6.2@85.217,16.383 TB6.2@95.377,16.383
  Bottom Layer w4.2: K6.5 71.996,13.068
  Bottom Layer w5: 71.996,13.068 75.311,16.383 TB6.2@85.217,16.383
  Bottom Layer w6: TB6.2@85.217,16.383 TB6.2@95.377,16.383
NetP1_1: P1.1 R3.1 | length 29.1
  Bottom Layer w0.8: P1.1@19.431,167.339 19.431,164.465 26.797,157.099 33.655,157.099 37.846,152.908 R3.1
NetP1_2: P1.2 R6.1 | length 60.7
  Bottom Layer w0.8: P1.2@21.971,167.339 21.971,164.846 27.813,159.004 35.306,159.004 40.64,153.67 40.64,125.73 38.608,123.698 R6.1@38.608,119.634
NetP1_3: P1.3 R9.1 | length 93.8
  Bottom Layer w0.8: P1.3@24.511,167.339 24.511,165.608 28.956,161.163 35.56,161.163 44.958,151.765 44.958,103.251 37.719,96.012 R9.1
NetP1_4: P1.4 R12.1 | length 125.6
  Bottom Layer w0.8: P1.4@27.051,167.339 27.051,165.608 29.591,163.068 36.068,163.068 47.117,152.019 47.117,71.628 37.084,61.595 R12.1
NetP1_5: P1.5 R15.1 | length 159.6
  Bottom Layer w0.8: P1.5@29.591,167.339 29.591,165.608 30.48,164.719 37.084,164.719 49.276,152.527 49.276,38.354 42.418,31.496 38.481,31.496 37.465,30.48 R15.1
NetP1_6: P1.6 R18.1 | length 149.4
  Mid-Layer 2 w0.8: P1.6 32.131,167.339 32.131,159.512 44.577,147.066 44.577,69.469 40.259,65.151 40.259,49.149 52.705,36.703 v1(55.88,36.703)
  Bottom Layer w0.8: v1(55.88,36.703) R18.1
NetP1_7: P1.7 R21.1 | length 114.6
  Mid-Layer 2 w0.8: P1.7 34.671,167.339 34.671,160.274 47.117,147.828 47.117,71.501 51.562,67.056 v1(54.483,67.056)
  Bottom Layer w0.8: v1(54.483,67.056) 54.737,67.31 R21.1
NetP1_8: P1.8 R24.1 | length 80.9
  Mid-Layer 2 w0.8: P1.8 37.211,167.339 37.211,161.417 49.149,149.479 49.149,102.489 51.816,99.822 v1(56.388,99.822)
  Bottom Layer w0.8: v1(56.388,99.822) R24.1@59.182,99.822
NetP1_9: P1.9 R27.1 | length 53.2
  Top Layer w0.8: v1(53.34,128.651) v1(59.436,128.651)
  Mid-Layer 2 w0.8: P1.9@39.751,167.35 39.751,161.798 50.927,150.622 50.927,131.064 v1(53.34,128.651)
  Bottom Layer w0.8: v1(59.436,128.651) 61.722,128.651 R27.1
NetP1_10: P1.10 R30.1 | length 27.7
  Mid-Layer 2 w0.8: P1.10@42.291,167.35 42.291,162.052 v1(45.72,158.623)
  Bottom Layer w0.8: v1(45.72,158.623) 51.689,152.654 R30.1@60.833,152.654
NetP1_11: P1.11 P1.12 TB-1.1 TB-1.2 | length 64.6
  Top Layer w3: TB-1.1@84.85,160.678 TB-1.2@95.01,160.678
  Bottom Layer w3: 46.35,167.3 46.228,167.178 46.228,163.957 49.51,160.675 85.578,160.675 85.725,160.528 TB-1.2@95.885,160.528
NetR1_1: R1.1 R2.2 | length 5.2
  Bottom Layer w0.8: R1.1@37.719,132.842 R2.2
NetR2_1: R2.1 R3.2 | length 4.8
  Bottom Layer w0.8: R2.1@37.846,141.605 R3.2
NetR4_1: R4.1 R5.2 | length 5.1
  Bottom Layer w1: R4.1@37.973,102.743 R5.2
NetR5_1: R5.1 R6.2 | length 4.3
  Bottom Layer w1: R5.1@38.354,111.633 R6.2
NetR7_1: R7.1 R8.2 | length 5.6
  Bottom Layer w1: R7.1 R8.2
NetR8_1: R8.1 R9.2 | length 4.8
  Bottom Layer w1: R8.1@37.719,80.645 R9.2
NetR10_1: R10.1 R11.2 | length 4.4
  Bottom Layer w1: R10.1 R11.2@37.465,45.339
NetR13_1: R13.1 R14.2 | length 5.1
  Bottom Layer w1: R13.1 R14.2@37.719,16.129
NetR14_1: R14.1 R15.2 | length 3.7
  Bottom Layer w1: R14.1 R15.2
NetR16_1: R28.1 R29.2 | length 3.6
  Bottom Layer w1: R28.1 R29.2@63.754,144.907
NetR17_1: R29.1 R30.2 | length 3.7
  Bottom Layer w1: R29.1@64.389,148.844 R30.2@64.389,152.527
NetR19_1: R25.1 R26.2 | length 4.6
  Bottom Layer w1: R25.1 62.103,118.999 64.008,120.904
NetR19_2: 
NetR22_1: R22.1 R23.2 | length 4.7
  Bottom Layer w1: R22.1 R23.2@62.23,90.932
NetR23_1: R23.1 R24.2 | length 4.3
  Bottom Layer w1: R23.1@62.992,94.869 R24.2@62.992,99.187
NetR25_1: R19.1 R20.2 | length 3.7
  Bottom Layer w1: R19.1 R20.2@62.103,59.563
NetR28_1: R16.1 R17.2 | length 3.7
  Bottom Layer w1: R16.1 R17.2@62.357,28.448
NetR28_2: 
NetR29_1: R17.1 R18.2 | length 4.4
  Bottom Layer w1: R17.1 R18.2@62.484,36.449
New1: R11.1 R12.2 | length 5.2
  Bottom Layer w1: R11.1@37.084,49.403 R12.2
NewNet: 
NewNet2: R20.1 R21.2 | length 3.9
  Bottom Layer w1: R20.1 R21.2@61.976,67.056
pads on no net: K1.6 K2.6 K3.6 K4.6 K5.6 K6.6 K7.6 K8.6 K9.6 K10.6

## Silkscreen, mask and mechanical layers (free items; w line width, h text height)
Top Overlay:
  lines w0.2: 5.6,175.525 5.675,175.45
  lines w0.254: -0.381,170.575 100.076,170.575 100.076,0 0,0 0,170.075 ; 0,-7.62 0,-7.112 ; 1.524,-7.874 0,-7.366 ; 1.524,-6.858 0,-7.366 ; 44.261,-7.366 0,-7.366 ; 55.739,-7.366 100,-7.366 ; 98.476,-7.874 100,-7.366 ; 98.476,-6.858 100,-7.366 ; 100,-7.62 100,-7.112 ; 110.543,169.051 111.05,170.575 ; 110.616,1.524 111.125,0 ; 110.796,170.575 111.304,170.575 ; 110.871,0 111.379,0 ; 111.084,93.946 111.05,170.575 ; 111.091,76.629 111.125,0 ; 111.559,169.051 111.05,170.575 ; 111.632,1.524 111.125,0
  text "170.575 (mm)" at 110.17,93.692 h1.52 r270.03
  text "Rev.0.2" at 58.166,1.27 h1.52
  text "©OpenStrom licensed under CC-BY-SA" at 16.129,1.143 h2.54
  text "100 (mm)" at 44.515,-8.28 h1.52